# Altium PCB PCB_BaseBoard.PcbDoc
Units mil, origin at the board's own origin, x right, y up, seen from the top; angles counter-clockwise.
Board outline 2677.17 x 3346.46 mil, 2 copper layers (Top Layer, Bottom Layer); 63 components, 134 nets, 269 pads, 36 vias.
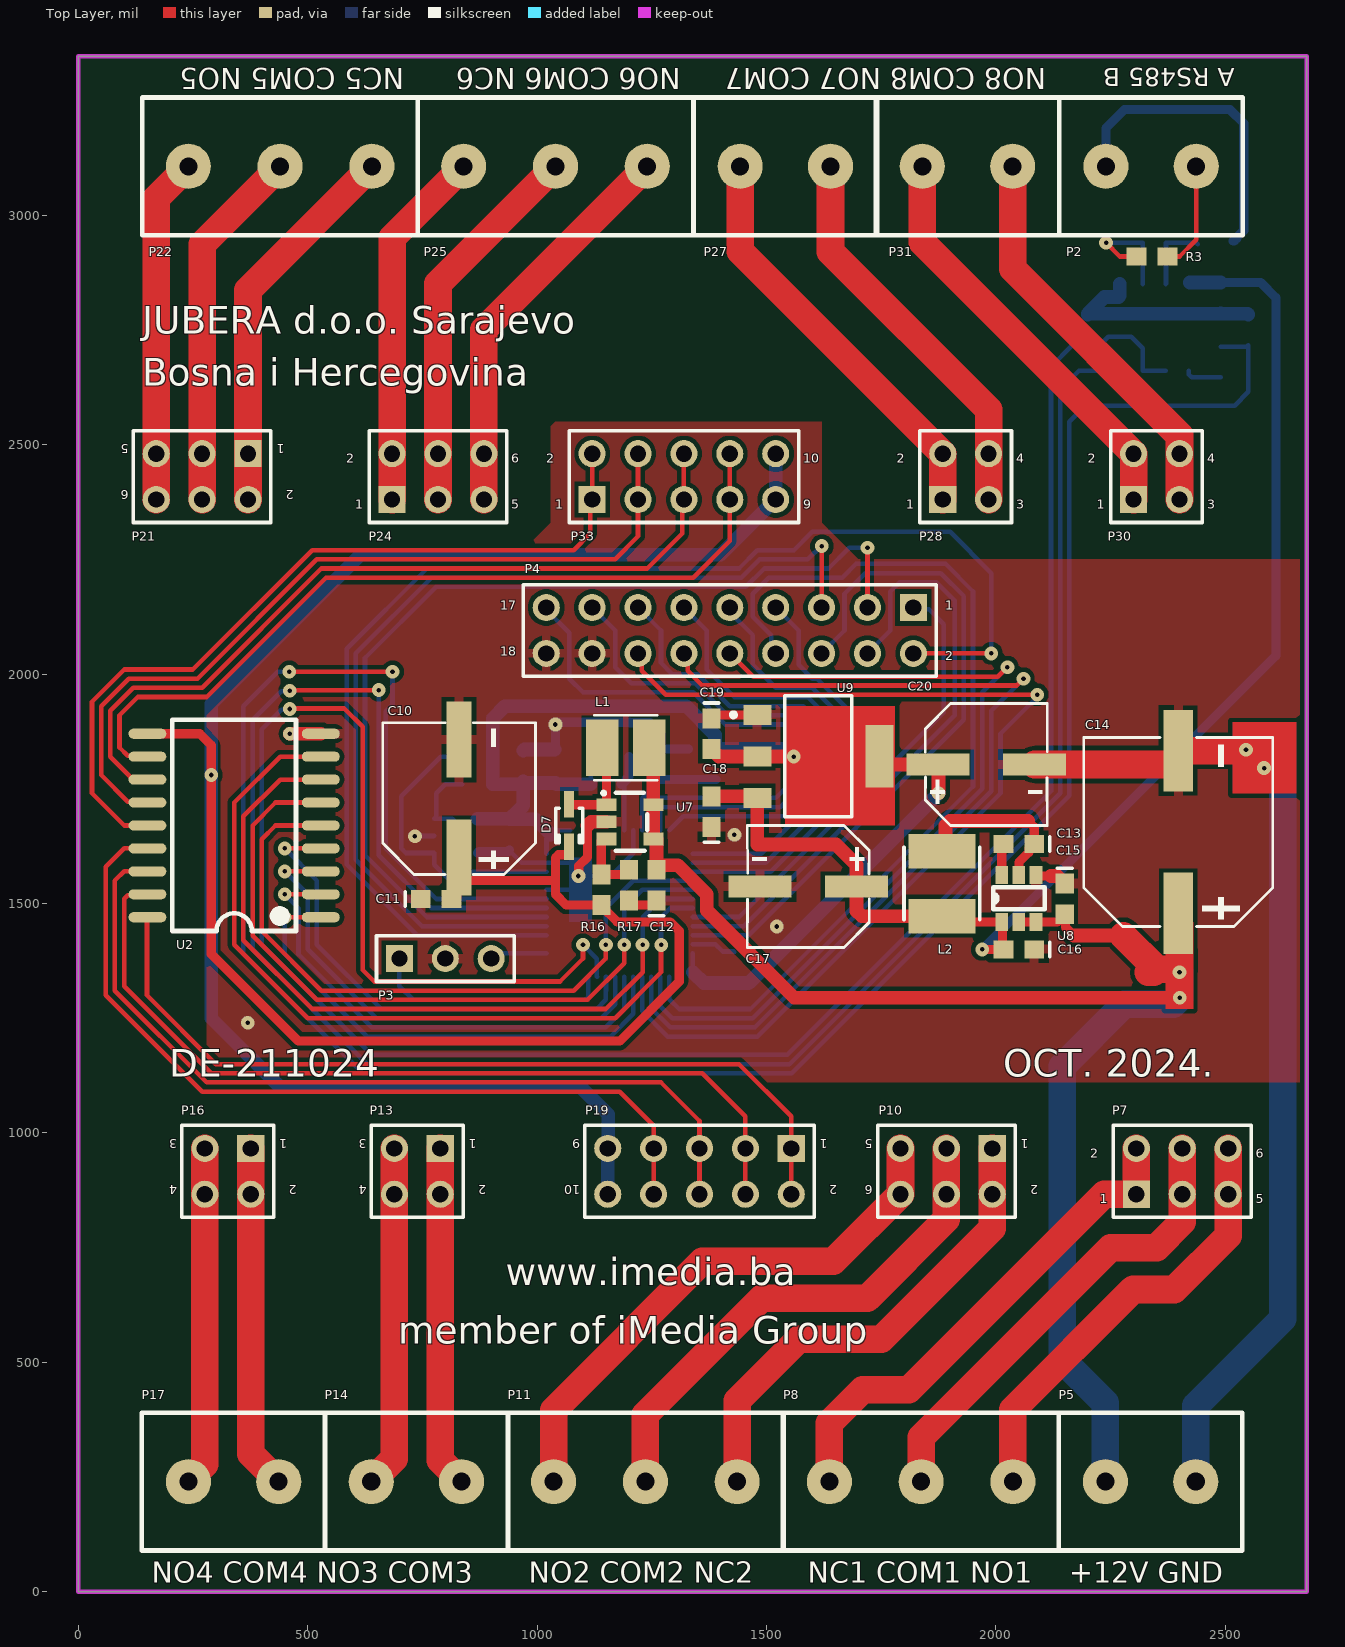
[diagram p0: Top Layer view]
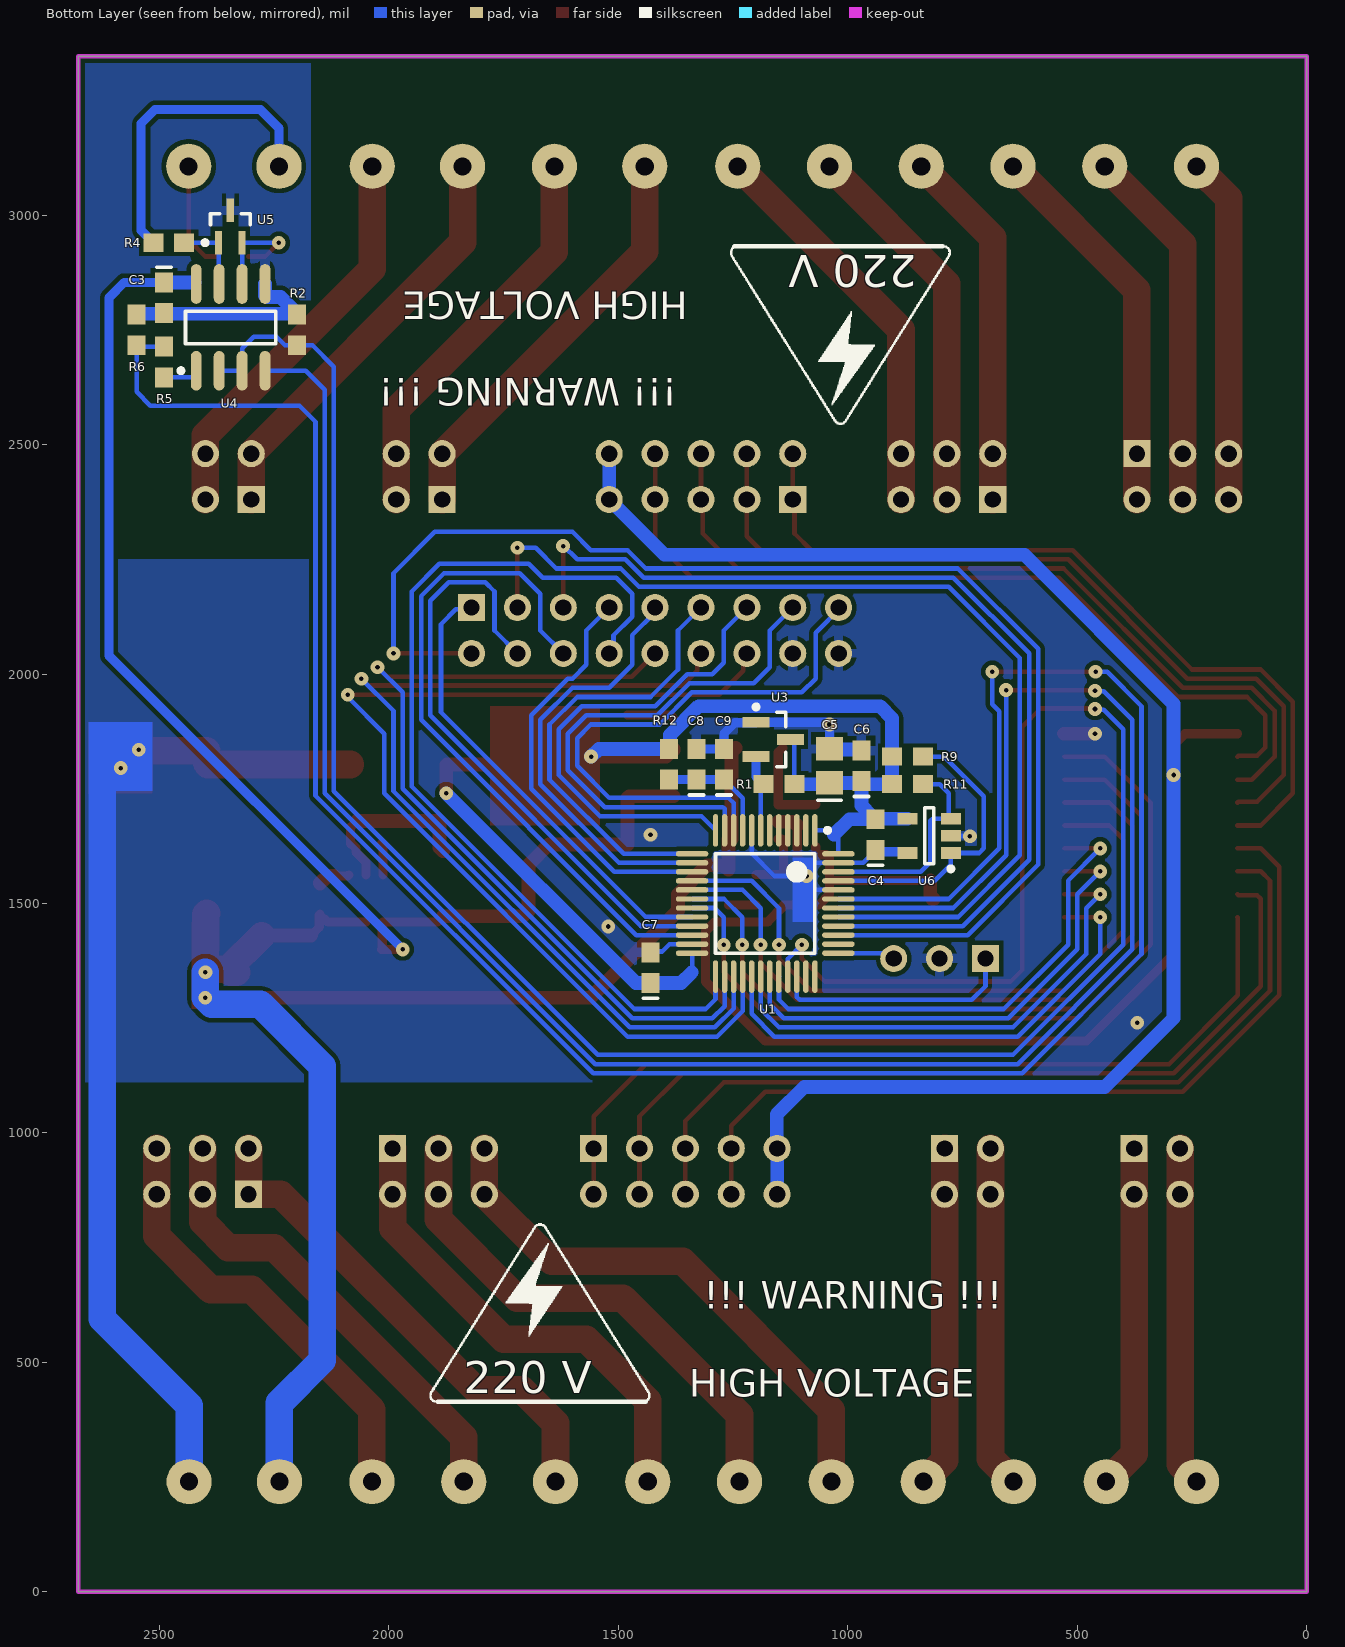
[diagram p1: Bottom Layer view, seen from below]

## Layer stack, top to bottom
Top Solder: solder mask 0.4, Solder Resist, Dk 3.5
Top Layer: signal copper 1.4
Dielectric 1: dielectric 12.6, FR-4, Dk 4.8
Bottom Layer: signal copper 1.4
Bottom Solder: solder mask 0.4, Solder Resist, Dk 3.5

## Board outline
0,0 0,3346.46 2677.17,3346.46 2677.17,0

## Design rules (kind name [scope] priority, off if disabled: settings)
BoardOutlineClearance [All] p1: gap=11.81 ignorepadtopadclearanceinfootprint=FALSE except(15.75: Arc-SplitBarrior Arc-SplitContinuation Track-SplitBarrior Track-SplitContinuation SMDPad-SplitBarrior SMDPad-SplitContinuation THPad-SplitBarrior THPad-SplitContinuation Via-SplitBarrior Via-SplitContinuation Fill-SplitBarrior Fill-SplitContinuation Poly-SplitBarrior Poly-SplitContinuation Region-SplitBarrior Region-SplitContinuation Text-SplitBarrior Text-SplitContinuation)
Clearance "Clearance Different Nets" [All] p1: gap=10 ignorepadtopadclearanceinfootprint=FALSE except(3.5: Arc-Arc Arc-Track Arc-SMDPad Track-Track Track-SMDPad; 5: SMDPad-SMDPad SMDPad-Via THPad-Via Via-Via; 7.87: Arc-THPad Arc-Hole Track-THPad Track-Hole SMDPad-THPad SMDPad-Hole THPad-Hole Fill-Hole Poly-Hole Region-Hole Text-Hole; 19.68: THPad-THPad Via-Hole)
Clearance "Clearance Same Nets" [All] p2: gap=10 ignorepadtopadclearanceinfootprint=FALSE except(3.5: Arc-Arc Arc-Track Arc-SMDPad Track-Track Track-SMDPad SMDPad-SMDPad; 5: SMDPad-Via THPad-Via; 7.87: Arc-THPad Arc-Hole Track-THPad Track-Hole SMDPad-THPad SMDPad-Hole THPad-THPad THPad-Hole Via-Hole Fill-Hole Poly-Hole Region-Hole Text-Hole)
Clearance "Clearance Bottom Layer" [OnLayer('Bottom Layer')] p3: gap=10 ignorepadtopadclearanceinfootprint=TRUE except(8: Arc-Arc Arc-Track Arc-SMDPad Arc-THPad Arc-Via Arc-Hole Track-Track Track-SMDPad Track-THPad Track-Via Track-Hole SMDPad-SMDPad SMDPad-THPad SMDPad-Via SMDPad-Hole THPad-THPad THPad-Via THPad-Hole Via-Via Via-Hole Fill-Hole Poly-Hole Region-Hole Text-Hole)
Clearance "Clearance Top Layer" [OnLayer('Top Layer')] p4: gap=10 ignorepadtopadclearanceinfootprint=TRUE except(8: Arc-Arc Arc-Track Arc-SMDPad Arc-THPad Arc-Via Arc-Hole Track-Track Track-SMDPad Track-THPad Track-Via Track-Hole SMDPad-SMDPad SMDPad-THPad SMDPad-Via SMDPad-Hole THPad-THPad THPad-Via THPad-Hole Via-Via Via-Hole Fill-Hole Poly-Hole Region-Hole Text-Hole)
HoleSize [All] p1: absolutevalues=TRUE maxlimit=248.03 minlimit=7.87 maxpercent=80.000 minpercent=20.000
MinimumAnnularRing [All] p1: minimumring=5.12
MinimumSolderMaskSliver [All] p1: minsoldermaskwidth=3.94
PolygonConnect PolygonConnect_1 [All] p1: thpad.connectstyle=Relief thpad.reliefconductorwidth=20 thpad.reliefentries=4 thpad.polygonreliefangle="90 Angle" thpad.airgapwidth=10 smdpad.connectstyle=Relief smdpad.reliefconductorwidth=20 smdpad.reliefentries=4 smdpad.polygonreliefangle="90 Angle" smdpad.airgapwidth=10 via.connectstyle=Direct via.reliefconductorwidth=20 via.reliefentries=4 via.polygonreliefangle="90 Angle" via.airgapwidth=10
RoutingCorners [All] p1: cornerstyle=Round minsetback=100 maxsetback=100
RoutingVias [All] p1: holewidth=19.68 width=39.37 viastyle="Through Hole" minholewidth=7.87 minwidth=13.78 maxholewidth=39.37 maxwidth=78.74
SilkToSilkClearance [All] p1: silktosilkclearance=3.94
SilkToSolderMaskClearance [IsPad] p1: minsilkscreentomaskgap=3.94 clearancetoexposedcopper=TRUE
SolderMaskExpansion [All] p1: expansion=4 istentingtop=FALSE
Width [All] p1: maxlimit=100 minlimit=3.5 preferedwidth=15
25 further rules are at their usual default settings.

## Classes and differential pairs
component class DE-211024_3: P21 P22 P24 P25 P27 P28 P30 P31 P33
component class DE-211024_2: P7 P8 P10 P11 P13 P14 P16 P17 P19
component class DE-211024_1: C3 C4 C5 C6 C7 C8 C9 C10 C11 C12 C13 C14 C15 C16 C17 C18 C19 C20 D7 L1 L2 P2 P3 P4 P5 R1 R2 R3 R4 R5 R6 R9 R11 R12 R16 R17 U1 U2 U3 U4 U5 U6 U7 U8 U9

## Components (designator, comment, footprint, x,y, rotation, side; value= is the part's Value field where it differs from the comment)
C3 "100nF" 0603 2490,2820 r270 bottom
C4 "" 0603 940,1650 r90 bottom value=100nF
C5 "4u7" 0805 1040,1800 r90 bottom
C6 "100nF" 0603 970,1800 r90 bottom
C7 "100nF" 0603 1430,1360 r90 bottom
C8 "1uF" 0603 1330,1803.46 r90 bottom
C9 "10nF" 0603 1270,1803.46 r90 bottom
C10 "220uF" SMD,D8xL10.2mm 836.39,1737.32 r90 top
C11 "" 0603 780,1510 r0 top value=100nF
C12 "C0603" 0603 1260,1540 r90 top value=3n3
C13 "" 0603 2050,1630 r180 top value=100nF
C14 "470uF" "ROQANG VT1V471M1010" 2403,1670 r90 top value=10uF
C15 "" 0603 2150,1510 r270 top value=100nF
C16 "" 0603 2050,1400 r180 top value=100nF
C17 "470uF" "SMD,D6.3xL7.7mm Aluminum Electrolytic Capacitors" 1580,1540 r180 top
C18 "" 0603 1380,1700 r90 top value=100nF
C19 "" 0603 1380,1870 r270 top value=100nF
C20 "" "SMD,D6.3xL7.7mm Aluminum Electrolytic Capacitors" 1990,1800 r0 top value=220uF
D7 "1N4148" SOD323 1070,1670 r270 top
L1 "10uH" "YJYCOIN CD32YP0302-100M" 1190,1840 r180 top
L2 "" XRNR4030-4.7uH/M 1880,1540 r90 top value=4,7uH
P2 "" "TERMINAL BLOK 2" 2338,3106.5 r270 top locked
P3 "ULINK ICSP" HDR1X3 700,1380 r0 top
P4 "Header 9X2" HDR2X9 1820,2145 r180 top
P5 "" "TERMINAL BLOK 2" 2337,240 r90 top locked
P7 "Header 3X2" HDR2X3 2306,866.3 r0 top locked
P8 "RELAY 1" "TERMINAL BLOK 3" 1837,240 r90 top locked
P10 "Header 3X2" HDR2X3 1992,966.3 r180 top locked
P11 "RELAY 2" "TERMINAL BLOK 3" 1236,240 r270 top locked
P13 "Header 2X2" HDR2X2 789,966.3 r180 top locked
P14 "RELAY 3" "TERMINAL BLOK 2" 737,240 r90 top locked
P16 "Header 2X2" HDR2X2 376,966.3 r180 top locked
P17 "RELAY 4" "TERMINAL BLOK 2" 338.5,240 r90 top locked
P19 "Header 5X2" HDR2X5 1554,966.3 r180 top locked
P21 "Header 3X2" HDR2X3 370,2480.3 r180 top locked
P22 "RELAY 5" "TERMINAL BLOK 3" 440,3106.5 r270 top locked
P24 "Header 3X2" HDR2X3 684.07,2380.3 r0 top locked
P25 "RELAY 6" "TERMINAL BLOK 3" 1040,3106.5 r90 top locked
P27 "RELAY 7" "TERMINAL BLOK 2" 1541,3106.5 r270 top locked
P28 "Header 2X2" HDR2X2 1884,2380.3 r0 top locked
P30 "Header 2X2" HDR2X2 2300,2380.3 r0 top locked
P31 "RELAY 8" "TERMINAL BLOK 2" 1938,3106.5 r270 top locked
P33 "Header 5X2" HDR2X5 1120,2380.3 r0 top locked
R1 "10K" ERA-0603 1150,1760 r180 bottom
R2 "10K" ERA-0603 2200,2750 r270 bottom
R3 "10R" ERA-0603 2340,2910 r180 top
R4 "10R" ERA-0603 2480,2940 r180 bottom
R5 "1K2" ERA-0603 2490,2680 r270 bottom
R6 "2K2" ERA-0603 2550,2750 r90 bottom
R9 "2K2" ERA-0603 870,1820 r0 bottom
R11 "2K2" ERA-0603 870,1760 r0 bottom
R12 "10R" ERA-0603 1390,1803.46 r90 bottom
R16 "2K2" ERA-0603 1140,1530 r270 top value=33K
R17 "2K2" ERA-0603 1200,1540 r90 top value=1K8
U1 "STM32F030C8T6" STM-LQFP48_N 1180,1500 r270 bottom
U2 "ULN2803A" SOIC-18_L11.6-W7.5-P1.27-LS10.3-BL 340,1670 r90 top
U3 "TLV803MDBZR" DBZ3_N 1162.6,1857.4 r180 bottom
U4 "SN75176BD" D008_N 2345,2755.51 r90 bottom
U5 "ESDS552" DCK3_N 2345.59,2975.43 r90 bottom
U6 "24AA01T-I/OT" SOT-23-OT5_N 822.76,1647.4 r0 bottom
U7 "AP3012KTR-E1" SOT-23-5 1200,1680 r180 top
U8 "" TSOT-26 2012.6,1460 r90 top
U9 "" ZZ311 1612.87,1820.55 r270 top

## Footprints (in the part's own frame and the unit in brackets; to place one, negate y for a bottom-side part, rotate by r counter-clockwise, add the part's x,y. Pads: shape width x height; smd on the part's side, far side on the other; paste and mask are expansions set on the pad)
0603 [mm] "Chip Capacitor; Body 1.6 x 0.8 mm (LxW typ)"
  rect 1.1x1 smd: 1(-0.85,0) 2(0.85,0)
  silkscreen extent -1.7,-0.4 -1.7,0.4
0805 [mm] "Chip Capacitor; Body 2.0 x 1.2 mm (LxW typ)"
  rect 1.3x1.5 smd: 1(-0.95,0) 2(0.95,0)
  silkscreen extent -1.9,-0.65 -1.9,0.65
D008_N [mm] "SOIC, 8-Leads, Body 4.9x3.9mm, Pitch 1.27mm, IPC Medium Density"
  oval 2.2x0.6 smd: 1(-2.4,1.905) 2(-2.4,0.635) 3(-2.4,-0.635) 4(-2.4,-1.905) 5(2.4,-1.905) 6(2.4,-0.635) 7(2.4,0.635) 8(2.4,1.905)
  silkscreen extent -2.52,-2.5 0.9,2.88, body extent -1.95,-2.45 1.95,2.45, height 1.75
DBZ3_N [mm] "SOT23, 3-Leads, Body 2.9x1.3mm, Pitch 0.95mm, Lead Span 2.4mm, IPC Medium Density"
  rect 1.5x0.6 smd: 1(-0.95,0.95) 2(-0.95,-0.95) 3(0.95,0)
  silkscreen extent -1.07,-1.5 0.7,1.92, body extent -0.7,-1.52 0.7,1.52, height 1.12
DCK3_N [mm] "SOT23, 3-Leads, Body 2.0x1.25mm, Pitch 0.65mm, Lead Span 2.1mm, IPC Medium Density"
  rect 1.3x0.4 smd: 1(-0.9,0.65) 2(-0.9,-0.65) 3(0.9,0)
  silkscreen extent -1.02,-1.1 0.7,1.53, body extent -0.7,-1.07 0.7,1.08, height 1.1
ERA-0603 [mm] "Chip Resistor; Body 1.6 x 0.8 mm (LxW typ)"
  rect 1.1x1 smd: 1(-0.85,0) 2(0.85,0)
HDR1X3 [mm] "Connector; Header; 3 Position"
  rect 1.5x1.5 hole 0.9: 1(0,0)
  round 1.5 hole 0.9: 2(2.54,0) 3(5.08,0)
  silkscreen extent -1.27,-1.27 6.35,1.27
HDR2X2 [mm] "Connector; Header; 2x2 Position"
  rect 1.5x1.5 hole 0.9: 1(0,0)
  round 1.5 hole 0.9: 2(0,2.54) 3(2.54,0) 4(2.54,2.54)
  silkscreen extent -1.27,-1.27 3.81,3.81
HDR2X3 [mm] "Connector; Header; 3x2 Position"
  rect 1.5x1.5 hole 0.9: 1(0,0)
  round 1.5 hole 0.9: 2(0,2.54) 3(2.54,0) 4(2.54,2.54) 5(5.08,0) 6(5.08,2.54)
  silkscreen extent -1.27,-1.27 6.35,3.81
HDR2X5 [mm] "Connector; Header; 5x2 Position"
  rect 1.5x1.5 hole 0.9: 1(0,0)
  round 1.5 hole 0.9: 2(0,2.54) 3(2.54,0) 4(2.54,2.54) 5(5.08,0) 6(5.08,2.54) 7(7.62,0) 8(7.62,2.54) 9(10.16,0) 10(10.16,2.54)
  silkscreen extent -1.27,-1.27 11.43,3.81
HDR2X9 [mm] "Connector; Header; 9x2 Position"
  rect 1.5x1.5 hole 0.9: 1(0,0)
  round 1.5 hole 0.9: 2(0,2.54) 3(2.54,0) 4(2.54,2.54) 5(5.08,0) 6(5.08,2.54) 7(7.62,0) 8(7.62,2.54) 9(10.16,0) 10(10.16,2.54) 11(12.7,0) 12(12.7,2.54) 13(15.24,0) 14(15.24,2.54) 15(17.78,0) 16(17.78,2.54) 17(20.32,0) 18(20.32,2.54)
  silkscreen extent -1.27,-1.27 21.59,3.81
"ROQANG VT1V471M1010" [mm] "470uF 35V 286mA@120Hz ±20% SMD,D10xL10.2mm Aluminum Electrolytic Capacitors - SMD ROHS"
  rect 4.5x1.65 smd: 1(-4.862,0.146) 2(4.138,0.146)
  silkscreen extent -5.59,-5.08 4.86,5.37, body extent -5,-5 5,5, height 10.2
"SMD,D6.3xL7.7mm Aluminum Electrolytic Capacitors" [mm]
  rect 3.5x1.2 smd paste+0 mask+0.051: 1(-2.949,0.074) 2(2.391,0.074)
  silkscreen extent -3.66,-3.3 3.1,3.45, body extent -3.4,-3.15 2.9,3.15, height 7.7
SMD,D8xL10.2mm [mm] "220uF 35V 195mA@120Hz ±20% SMD,D8xL10.2mm Aluminum Electrolytic Capacitors - SMD ROH"
  rect 4.2x1.4 smd paste+0 mask+0.051: 1(-3.488,0.162) 2(3.046,0.162)
  silkscreen extent -4.42,-4.06 3.98,4.39, body extent -4.25,-3.82 3.75,4.18, height 10.2
SOD323 [mm] "SOD-323/SC-76; 2 Leads; Body 1.7 x 1.3 mm, (LxW)"
  rect 1.45x0.55 smd: 1(1.175,0) 2(-1.175,0)
  silkscreen extent -0.95,-0.75 0.95,0.75
SOIC-18_L11.6-W7.5-P1.27-LS10.3-BL [mm] ";SOIC-18-300mil;SOIC-18;SOP-18-300mil;SOIC-18_300mil;SO-18;SW-18;SOP-18;SOIC-18-W;-;SO-18-300mil"
  oval 0.56x2.1 smd: 1(-5.08,-4.792) 2(-3.81,-4.792) 3(-2.54,-4.792) 4(-1.27,-4.792) 5(0,-4.792) 6(1.27,-4.792) 7(2.54,-4.792) 8(3.81,-4.792) 9(5.08,-4.792) 10(5.08,4.808) 11(3.81,4.808) 12(2.54,4.808) 13(1.27,4.808) 14(0,4.808) 15(-1.27,4.808) 16(-2.54,4.808) 17(-3.81,4.808) 18(-5.08,4.808)
  silkscreen extent -5.84,-3.42 5.84,3.44
SOT-23-5 [mm] "SMD package"
  rect 1.1x0.7 smd paste+0 mask+0.051: 1(1.233,-0.897) 2(1.233,0.053) 3(1.233,1.005) 4(-1.355,1.005) 5(-1.355,-0.895)
  silkscreen extent -1.03,-1.6 1.46,1.66
SOT-23-OT5_N [mm] "SOT23, 5-Leads, Body 2.9x1.6mm, Pitch 0.95mm, Lead Span 2.7mm, IPC Medium Density"
  rect 1.1x0.65 smd: 1(-1.2,0.95) 2(-1.2,0) 3(-1.2,-0.95) 4(1.2,-0.95) 5(1.2,0.95)
  silkscreen extent -1.32,-1.55 0.25,1.95, body extent -0.9,-1.55 0.9,1.55, height 1.45
STM-LQFP48_N [mm] "QFP, 48-Leads, Body 7x7mm, Pitch 0.5mm, IPC Medium Density"
  oval 1.8x0.3 smd: 1(-4.05,2.75) 2(-4.05,2.25) 3(-4.05,1.75) 4(-4.05,1.25) 5(-4.05,0.75) 6(-4.05,0.25) 7(-4.05,-0.25) 8(-4.05,-0.75) 9(-4.05,-1.25) 10(-4.05,-1.75) 11(-4.05,-2.25) 12(-4.05,-2.75) 25(4.05,-2.75) 26(4.05,-2.25) 27(4.05,-1.75) 28(4.05,-1.25) 29(4.05,-0.75) 30(4.05,-0.25) 31(4.05,0.25) 32(4.05,0.75) 33(4.05,1.25) 34(4.05,1.75) 35(4.05,2.25) 36(4.05,2.75)
  oval 0.3x1.8 smd: 13(-2.75,-4.05) 14(-2.25,-4.05) 15(-1.75,-4.05) 16(-1.25,-4.05) 17(-0.75,-4.05) 18(-0.25,-4.05) 19(0.25,-4.05) 20(0.75,-4.05) 21(1.25,-4.05) 22(1.75,-4.05) 23(2.25,-4.05) 24(2.75,-4.05) 37(2.75,4.05) 38(2.25,4.05) 39(1.75,4.05) 40(1.25,4.05) 41(0.75,4.05) 42(0.25,4.05) 43(-0.25,4.05) 44(-0.75,4.05) 45(-1.25,4.05) 46(-1.75,4.05) 47(-2.25,4.05) 48(-2.75,4.05)
  silkscreen extent -4.17,-2.75 2.75,3.57, body extent -3.5,-3.5 3.5,3.5, height 1.6
"TERMINAL BLOK 2" [mm] "Terminal blok 3,5mm"
  round 2.5 hole 1: 1(0,-2.5) 2(0,2.5)
  silkscreen extent -3.81,-5.08 3.81,5.08
"TERMINAL BLOK 3" [mm] "Terminal blok konektor 3 pina"
  round 2.5 hole 1: 1(0,5.08) 2(0,0) 3(0,-5.08)
  silkscreen extent -3.81,-7.62 3.81,7.62
TSOT-26 [mm]
  rect 1x0.7 smd: 1(0,0) 2(0,-0.95) 3(0,-1.9) 4(2.6,-1.9) 5(2.6,-0.95) 6(2.6,0)
  silkscreen extent 0.69,-2.38 1.91,0.48, body extent 0.53,-2.51 2.03,0.61, height 1
XRNR4030-4.7uH/M [mm] "2A 4.7uH Magnetic Adhesive Inductor ±20% 2.9A SMD-2P,4x4mm Power Inductors ROHS"
  rect 1.9x3.7 smd paste+0 mask+0.051: 1(-1.717,-0.059) 2(1.883,-0.059)
  silkscreen extent -1.92,-2.16 2.08,2.04
"YJYCOIN CD32YP0302-100M" [mm] "1A 10uH ±20% SMD,3.5x3x2.1mm Power Inductors ROHS"
  rect 1.8x3.12 smd paste+0 mask+0.051: 1(1.22,0.022) 2(-1.386,0.022)
  silkscreen extent -1.83,-1.78 1.67,1.82
ZZ311 [mm] "SOT-223/SC-73; 4 Leads; Body 6.7 x 7.3 mm, inc. leads (LxW max)"
  rect 1.1x1.55 smd: 1(-2.3,-3.375) 2(0,-3.375) 3(2.3,-3.375)
  rect 3.45x1.55 smd: 4(0,3.375)
  silkscreen extent -3.35,-4.82 3.35,1.85

## Part data
C3 C4 C6 C7 C8 C9 C11 C15 C19: library part C0603, "Ceramic Chip Capacitor - Standard", PackageDocument=Mar-2001, Code_IPC="1608 [0603]", Code_JEITA=0603, ComponentLink1Description="Manufacturer Link", ComponentLink1URL=http://www.kemet.com/, ComponentLink2Description=Datasheet, ComponentLink2URL=http://www.kemet.com/kemet/web/homepage/kechome.nsf/vapubfilesname/F3102TA.pdf/$file/F3102TA.pdf, DatasheetDocument=Mar-2001, LatestRevisionDate=19-Mar-2004, LatestRevisionNote="Silkscreen size reduced.", Note="Footprint corresponds to dimensions for bulk cassette packaging. This case size has tightened tolerances.", PackageReference=0603, Published=17-Jul-2002, Publisher="Altium Limited"
C5: library part C0805, "Ceramic Chip Capacitor - Standard", PackageDocument=Mar-2001, Code_IPC=2012[0805], Code_JEITA=0805, ComponentLink1Description="Manufacturer Link", ComponentLink1URL=http://www.kemet.com/, ComponentLink2Description=Datasheet, ComponentLink2URL=http://www.kemet.com/kemet/web/homepage/kechome.nsf/vapubfilesname/F3102TA.pdf/$file/F3102TA.pdf, DatasheetDocument=Mar-2001, LatestRevisionDate=19-Mar-2004, LatestRevisionNote="Silkscreen size reduced.", Note="Footprint corresponds to dimensions for bulk cassette packaging. This case size has tightened tolerances.", PackageReference=0805, Published=17-Jul-2002, Publisher="Altium Limited"
C10: library part "ROQANG VT1V221M0810", "220uF 35V 195mA@120Hz ±20% SMD,D8xL10.2mm Aluminum Electrolytic Capacitors - SMD ROHS", ComponentLink1Description="Manufacturer Link", ComponentLink1URL=http://www.vishay.com/, ComponentLink2Description=Datasheet, ComponentLink2URL=http://www.vishay.com/docs/25014/eka.pdf, DatasheetDocument=20-Feb-2001, DrillSize="Nominal, Rounded To The Nearest 0.1mm", Note="Refer to Manufacturer's Data Sheets for other lead formations", PackageReference=CAPPR2-5X11, Published=19-Mar-2004, Publisher="Altium Limited"
C12: "Ceramic Chip Capacitor - Standard", PackageDocument=Mar-2001, Code_IPC="1608 [0603]", Code_JEITA=0603, ComponentLink1Description="Manufacturer Link", ComponentLink1URL=http://www.kemet.com/, ComponentLink2Description=Datasheet, ComponentLink2URL=http://www.kemet.com/kemet/web/homepage/kechome.nsf/vapubfilesname/F3102TA.pdf/$file/F3102TA.pdf, DatasheetDocument=Mar-2001, LatestRevisionDate=19-Mar-2004, LatestRevisionNote="Silkscreen size reduced.", Note="Footprint corresponds to dimensions for bulk cassette packaging. This case size has tightened tolerances.", PackageReference=0603, Published=17-Jul-2002, Publisher="Altium Limited"
C13 C16 C18: library part C0603, "Ceramic Chip Capacitor - 25V", PackageDocument=Mar-2001, Code_IPC="1608 [0603]", Code_JEITA=0603, ComponentLink1Description="Manufacturer Link", ComponentLink1URL=http://www.kemet.com/, ComponentLink2Description=Datasheet, ComponentLink2URL=http://www.kemet.com/kemet/web/homepage/kechome.nsf/vapubfilesname/F3102TA.pdf/$file/F3102TA.pdf, DatasheetDocument=Mar-2001, LatestRevisionDate=19-Mar-2004, LatestRevisionNote="Silkscreen size reduced.", Note="Footprint corresponds to dimensions for bulk cassette packaging. This case size has tightened tolerances.", PackageReference=0603, Published=17-Jul-2002, Publisher="Altium Limited"
C14 C17 C20: library part "ROQANG VT1C221M0607", "220uF 16V 110mA@120Hz ±20% SMD,D6.3xL7.7mm Aluminum Electrolytic Capacitors - SMD ROHS", ComponentLink1Description="Manufacturer Link", ComponentLink1URL=http://www.vishay.com/, ComponentLink2Description=Datasheet, ComponentLink2URL=http://www.vishay.com/docs/25014/eka.pdf, DatasheetDocument=20-Feb-2001, DrillSize="Nominal, Rounded To The Nearest 0.1mm", Note="Refer to Manufacturer's Data Sheets for other lead formations", PackageReference=CAPPR2-5X11, Published=19-Mar-2004, Publisher="Altium Limited"
D7: library part BAS321, "General-purpose Diode", ComponentLink1Description="Manufacturer Link", ComponentLink1URL=http://www.semiconductors.philips.com/, ComponentLink2Description=Datasheet, ComponentLink2URL=http://www.semiconductors.philips.com/acrobat/datasheets/BAS321_2.pdf, DatasheetVersion=9-Feb-1999, LatestRevisionDate=19-Mar-2004, LatestRevisionNote="Silkscreen size reduced.", PackageDescription="SOD-323/SC-76; 2 Leads; Body 1.7 x 1.3 mm, (LxW)", PackageReference=SOD323, PackageVersion=May-1999, Published=17-Sep-2003, Publisher="Altium Limited"
L1: library part Inductor
L2: library part Inductor, "2A 4.7uH Magnetic Adhesive Inductor ±20% 2.9A SMD-2P,4x4mm Power Inductors ROHS"
P2 P5 P14 P17 P27 P31: library part "TERMINAL BLOK 2", "Terminal blok konektor 3,5 mm"
P3: library part "Header 3", "Header, 3-Pin", LatestRevisionDate=17-Jul-2002, LatestRevisionNote="Re-released for DXP Platform.", Publisher="Altium Limited"
P4: "Header, 9-Pin, Dual row", LatestRevisionDate=17-Jul-2002, LatestRevisionNote="Re-released for DXP Platform.", Publisher="Altium Limited"
P7 P10 P21 P24: "Header, 3-Pin, Dual row", LatestRevisionDate=17-Jul-2002, LatestRevisionNote="Re-released for DXP Platform.", Publisher="Altium Limited"
P8 P11 P22 P25: library part "TERMINAL BLOK 3", "3 pinski terminal blok konektor"
P13 P16 P28 P30: "Header, 2-Pin, Dual row", LatestRevisionDate=17-Jul-2002, LatestRevisionNote="Re-released for DXP Platform.", Publisher="Altium Limited"
P19 P33: "Header, 5-Pin, Dual row", LatestRevisionDate=17-Jul-2002, LatestRevisionNote="Re-released for DXP Platform.", Publisher="Altium Limited"
R1 R9 R11 R16 R17: library part ERA3Y, "Rectangular Thick Film Chip Resistor, 10 Ohm to 330k Ohm Range, 0.1% and 0.5% Tolerance, 0603 Size, 0.063 W", PackageDocument=Mar-2003, Code_IPC="1608 [0603]", ComponentLink1Description="Manufacturer Link", ComponentLink1URL=http://www.panasonic.com/industrial/components/resistive_products.htm, ComponentLink2Description=Datasheet, ComponentLink2URL=http://www.panasonic.com/industrial/components/pdf/AOA0000CE8.pdf, LatestRevisionDate=19-Mar-2004, LatestRevisionNote="Silkscreen size reduced.", Note="If flow soldering, adjust pad width of PCB Footprint to 0.7 - 0.8 times the width of the resistor.", PackageReference=ERA-0603, Published=17-Dec-2003, Publisher="Altium Limited"
R2 R3 R4 R5 R6: library part ERAV, "Metal Film Thermosensitive Chip Resistor, 0.56 Ohm to 10k Ohm Range, 5% Tolerance, 0603 Size, 0.063 W", PackageDocument=Mar-2003, Code_IPC="1608 [0603]", ComponentLink1Description="Manufacturer Link", ComponentLink1URL=http://www.panasonic.com/industrial/components/resistive_products.htm, ComponentLink2Description=Datasheet, ComponentLink2URL=http://www.panasonic.com/industrial/components/pdf/AOF0000CE1.pdf, LatestRevisionDate=19-Mar-2004, LatestRevisionNote="Silkscreen size reduced.", Note="If flow soldering, adjust pad width of PCB Footprint to 0.7 - 0.8 times the width of the resistor.", PackageReference=ERA-0603, Published=17-Dec-2003, Publisher="Altium Limited"
R12: library part ERA6Y, "Rectangular Thick Film Chip Resistor, 10 Ohm to 1M Ohm Range, 0.1% and 0.5% Tolerance, 0805 Size, 0.1 W", PackageDocument=Mar-2003, Code_IPC="2012 [0805]", ComponentLink1Description="Manufacturer Link", ComponentLink1URL=http://www.panasonic.com/industrial/components/resistive_products.htm, ComponentLink2Description=Datasheet, ComponentLink2URL=http://www.panasonic.com/industrial/components/pdf/AOA0000CE8.pdf, LatestRevisionDate=19-Mar-2004, LatestRevisionNote="Silkscreen size reduced.", Note="If flow soldering, adjust pad width of PCB Footprint to 0.7 - 0.8 times the width of the resistor.", PackageReference=ERA-0805, Published=17-Dec-2003, Publisher="Altium Limited"
U1: "ARM Cortex-M0 32-bit MCU, 64 KB Flash, 8 KB Internal RAM, 39 I/Os, 48-pin LQFP, -40 to 85 degC, Tray", I/Os (High Current)=39, Operating Frequency(F) (Processor speed) (MHz)=48, Supplier Part Number 1=497-14043-ND, Supply Voltage(Vcc) min (V)=2.4, ComponentLink1Description="Manufacturer URL", ComponentLink1URL=http://www.st.com/web/en/home.html, ComponentLink2Description=Datasheet, ComponentLink2URL=http://www.st.com/st-web-ui/static/active/en/resource/technical/document/datasheet/DM00088500.pdf, ComponentLink3Description="Package Specification", ComponentLink3URL=http://www.st.com/st-web-ui/static/active/en/resource/technical/document/datasheet/DM00058181.pdf, Core="ARM Cortex-M0", DatasheetVersion="Rev. 1", FLASH Size (Prog) (kB)=64, Internal RAM Size (kB)=8, Mounting Technology="Surface Mount", PackageDescription="48-Pin Low Profile Quad Flat Package, 7 x 7 mm Body, 0.5 mm Pitch", PackageReference=LQFP48, PackageVersion="Rev. 6, 06/2013", Packing=Tray, PartNumber=STM32F030C8T6, Supplier 1=Digi-Key, Supplier 2=Newark, Supplier 3=Mouser, Supplier Part Number 2=06X3647, Supplier Part Number 3=511-STM32F030C8T6
U2: "High-Voltage, High-Current Darlington Array", ComponentLink1Description="Manufacturer Link", ComponentLink1URL=http://www.allegromicro.com/, DatasheetVersion=1999, LatestRevisionDate=06-Jun-2005, LatestRevisionNote="Stylized 3D Model Added.", PackageDescription="DIP; 18 Leads; Row Spacing 7.62 mm; Pitch 2.54 mm", PackageReference=A18, PackageVersion=1999, Published=13-Oct-2000, Publisher="Altium Limited"
U3: "Voltage Supervisor with Active-Low, Open Drain Reset, 1 Supply Monitored, -40 to 125 degC, 3-pin SOT-23 (DBZ), Green (RoHS & no Sb/Br)", Manufacturer="Texas Instruments", Rating=Catalog, Supplier Part Number 1=296-29194-2-ND, Threshold Voltage 1 (typ)(Typ)(V)=4.38, # of supplies monitored=1, Code_JEDEC=TO-236-AB, ComponentLink1Description=Datasheet, ComponentLink1URL=http://www.ti.com/general/docs/lit/getliterature.tsp?genericPartNumber=TLV803M&fileType=pdf, DatasheetVersion=SBVS157B, Iq(Typ)(uA)=9, Mounting Technology="Surface Mount", Output Driver Type / Reset Output="Active-low, Open-drain", PackageDescription="3-Pin Plastic Small-Outline Package, 0.95 mm Pitch, 2.4 mm Lead Span", PackageReference=DBZ3, PackageVersion="revB, Apr-2005", PartNumber=TLV803MDBZR, Reset Threshold Accuracy(%)=2, SubFamily="Supervisor and Reset IC", Supplier 1=Digi-Key, Supplier 2=Digi-Key, Supplier 3=Digi-Key, Supplier 4=Newark, Supplier 5=Mouser, Supplier Part Number 2=296-29194-1-ND, Supplier Part Number 3=296-29194-6-ND, Supplier Part Number 4=58T0286, Supplier Part Number 5=595-TLV803MDBZR, Time Delay(ms)=200, VCC(Max)(V)=6, VCC(Min)(V)=1.1
U4: "Differential Bus Transceiver", Code_IPC=SOIC127P600-8, ComponentLink1Description="Manufacturer Link", ComponentLink1URL=http://www.ti.com/, ComponentLink2Description=Datasheet, ComponentLink2URL=http://www-s.ti.com/sc/ds/sn75176b.pdf, DatasheetVersion=Sep-1989, LatestRevisionDate=13-Apr-2006, LatestRevisionNote="IPC-7351 Footprint Added.", Note="Receiver Hysteresis of 50mV Typical", PackageDescription="8-Pin Small Outline Integrated Circuit 1.27 mm Pitch", PackageReference=D008, PackageVersion=Jan-1998, Published=15-May-2002, Publisher="Altium Limited"
U5: library part TPD2E007DCKR, "ESD Protection Array for AC Signal Data Interface, 2 Channels, -40 to +85 degC, 3-pin SC70 (DCK), Green (RoHS & no Sb/Br)", Breakdown Voltage(Min)(V)=+/-14, IO Capacitance(Typ)(pF)=15, IO Leakage Current(nA)=50, Manufacturer="Texas Instruments", Supplier Part Number 1=296-25281-2-ND, ComponentLink1Description=Datasheet, ComponentLink1URL=http://www.ti.com/general/docs/lit/getliterature.tsp?genericPartNumber=TPD2E007&fileType=pdf, ComponentLink2Description="URL Link1", ComponentLink2URL=SamplesURL:http://www.ti.com/product/tpd2e007#samples, DatasheetVersion=SLVS796E, Eco-Plan="Green (RoHS & no Sb/Br)", IEC 61000-4-2 Air-Gap(+/- kV)=15, IEC 61000-4-2 Contact(+/- kV)=8, Mounting Technology="Surface Mount", PackageDescription="3-Pin Plastic Small-Outline Package, 0.65 mm Pitch, 2.1 mm Lead Span", PackageReference=DCK3, PackageVersion="revG, Jan-2007", PartNumber=TPD2E007DCKR, SubFamily="ESD Solution", Supplier 1=Digi-Key, Supplier 2=Digi-Key, Supplier 3=Digi-Key, Supplier 4=Farnell, Supplier 5=Newark, Supplier 6=Newark, Supplier 7=Mouser, Supplier Part Number 2=296-25281-1-ND, Supplier Part Number 3=296-25281-6-ND, Supplier Part Number 4=2120465, Supplier Part Number 5=94T5089, Supplier Part Number 6=55R7554, Supplier Part Number 7=595-TPD2E007DCKR
U6: "1Kbit, 400kHz, 1.8V, I2C Serial EEPROM, 5-Pin SOT-23, Industrial Temperature, Tape and Reel", Supplier Part Number 1=24AA01T-I/OTTR-ND, Code_IPC=SOT23-5, ComponentLink1Description=Datasheet, ComponentLink1URL=http://ww1.microchip.com/downloads/en/DeviceDoc/21711J.pdf, ComponentLink2Description="Packaging Specification", ComponentLink2URL=http://www.microchip.com/stellent/groups/techpub_sg/documents/packagingspec/en012702.pdf, ComponentLink3Description="Microchip.com Home", ComponentLink3URL=http://www.microchip.com/, DatasheetVersion="revJ, Jan-2009", PackageDescription="5-Lead Plastic Small Outline Transistor (OT) [SOT-23]", PackageReference=SOT-23-OT5, PackageVersion="revBB, Aug-2009", Published=29-Jan-2009, Publisher="Altium Limited", Supplier 1=Digi-Key, Supplier 2=Digi-Key, Supplier 3=Digi-Key, Supplier 4=Farnell, Supplier Part Number 2=24AA01T-I/OTCT-ND, Supplier Part Number 3=24AA01T-I/OTDKR-ND, Supplier Part Number 4=1331269
U7: library part AP3012, "Diodes Incorporated AP3012KTR-E1 Boost type Adjustable 1.25V~29V 500mA 2.6V~16V SOT-23-5 DC-DC Converters ROHS"
U8: library part AP63200, "2A synchronous  buck converter"
U9: library part REG1117-3.3, "800mA and 1A Low Dropout Positive Regulator 2.85V, 3.3V, 5V, and Adjustable", ComponentLink1Description="Manufacturer Link", ComponentLink1URL=http://www.ti.com/, ComponentLink2Description=Datasheet, ComponentLink2URL=http://www-s.ti.com/sc/ds/REG1117.pdf, DatasheetVersion=Sep-1997, LatestRevisionDate=17-Jul-2002, LatestRevisionNote="Re-released for DXP Platform.", PackageDescription="SOT-223/SC-73; 4 Leads; Body 6.7 x 7.3 mm, inc. leads (LxW max)", PackageReference=ZZ311, PackageVersion=revC, Published=8-Jun-2000, Publisher="Altium Limited"

## Via types
v1: diameter 30, hole 10, Top Layer to Bottom Layer, 36 vias

## Nets (pads, with @x,y where several pads share a name; then routed paths per layer and width w, separated by ;. In a path a pad name is that pad's centre, name@x,y a point inside that pad or via, vN(x,y) a via of type N, cw(c..) or ccw(c..) an arc to the next point about the centre after c; other vN are vias at no path point)
3V3: C4.2 C5.1 C6.1 C7.1 C19.2 C20.1 R1.2 R9.2 R11.2 R12.2 U1.1 U1.24 U1.48 U3.3 U6.4 U9.2 U9.4 | length 2876.1
  Top Layer w30: C19.2 1380,1834.57 1384.69,1829.88 1386.65,1829.88 1395.98,1820.55 U9.2 1549.45,1820.55 1550,1820 1745.2,1820 U9.4 1745.75,1818.41 1761.26,1802.9 C20.1 1875,1801.8 v1(1875,1740)
  Bottom Layer w10: U1.48 1020.55,1640.55 1030,1650 1039.45,1659.45 U1.1 ; R1.2 1116.54,1850.59 1123.35,1857.4 U3.3 ; U1.24 1339.45,1350.55 1340,1350
  Bottom Layer w30: U6.4 938.66,1684.8 C4.2 996.54,1683.46 1030,1650 ; C4.2@944.69,1690.12 946.65,1690.12 970,1713.46 970,1764.69 965.31,1760 R11.2 R9.2 903.46,1903.46 930,1930 1325,1930 1387.73,1867.27 1387.73,1839.2 R12.2 1542.63,1836.93 v1(1559.41,1820.14) ; C6.1 973.94,1762.6 C5.1 1042.6,1760 R1.2 ; 1340,1350 1363.46,1326.54 C7.1 1461.54,1326.54 v1(1875,1740)
5V: C3.1 C16.2 C17.1 C18.2 L2.1 U4.8 U8.1 U9.3 | length 2857.9
  Top Layer w20: L2.1 1894.72,1460 U8.1 2014.57,1458.03 2014.57,1401.97 C16.2 v1(1970,1400)
  Top Layer w30: C18.2 1476.54,1733.46 U9.3 1480,1628.39 1651.61,1628.39 1696.1,1583.9 C17.1 1696.1,1483.9 1707.6,1472.4 L2.1
  Bottom Layer w20: v1(1970,1400) 2610,2040 2610,2820 2576.54,2853.46 C3.1
  Bottom Layer w30: U4.8@2423.19,2853.46 C3.1
12V: C12.2 C14.1 C15.2 L1.2 P5.2 U7.4 U7.5 U8.2 U8.3 | length 3448.7
  Top Layer w20: U8.2 U8.3 2133.43,1460 2138.31,1464.88 2140.31,1464.88 C15.2@2150,1474.57 ; C15.2 2151.74,1474.8 2151.74,1448.26 2170,1430
  Top Layer w30: L1.2 1253.35,1830.36 U7.5 U7.4 1258.78,1640.44 1260,1639.22 C12.2@1260,1575.43 ; C12.2 C12.2@1260,1575.43 ; 2170,1430 2277.39,1430 ; v1(2400.53,1294.55) 1560.45,1294.55 1370,1485 1370,1520 1306.54,1583.46 1274.5,1583.46 1271.15,1580.12 1264.69,1580.12 C12.2@1260,1575.43
  Top Layer w60: 2277.39,1430 2350.89,1356.5 ; 2332.13,1350 2344.39,1350 2350.89,1356.5 ; C14.1 2399.72,1476.1 2399.72,1401.68 2400,1401.4 v1@2400,1356.5 ; v1(2400,1350) v1@2400,1356.5 ; 2350.89,1356.5 v1@2400,1356.5
  Bottom Layer w60: P5.2 2238.57,411.43 2145,505 2145,1145 2280,1280 2385.98,1280 v1(2400.53,1294.55) 2400.53,1349.47 v1(2400,1350)
24V: C10.1 C11.2 D7.1 P19.9 P19.10 P33.9 P33.10 R16.2 U2.10 | length 5890.1
  Top Layer w20: U2.10 265,1870 290,1845 v1(290,1780) 290,1390 480,1200 1180,1200 1310,1330 1310,1440 1290,1460 1174.57,1460 1140,1494.57 R16.2 1063.46,1496.54 1040,1520 1040,1550 ; C10.1@820.12,1550 1040,1550 ; D7.1 1070,1607.12 1069.17,1606.3 1046.88,1606.3 1040,1599.41 1040,1550
  Top Layer w30: C11.2 815.43,1510 820.12,1514.69 C10.1@820.12,1550
  Bottom Layer w30: P19.10 P19.9 1155,967.3 1155,1040 1095,1100 440,1100 290,1250 v1(290,1780) 290,1935 615,2260 1399.7,2260 P33.9 P33.10
+24_REL: 
+24_REL2: 
_COM1: P7.3 P7.4 P8.2 | length 1033.2
  Top Layer w60: P8.2 1837,337 2250,750 2350,750 2406,806 P7.3 ; P7.3@2406,853.68 P7.4
_COM2: P10.3 P10.4 P11.2 | length 1132.8
  Top Layer w60: P11.2 1236,386 1490,640 1720,640 1892,812 P10.3
_COM3: P13.1 P13.2 P14.1 | length 745.5
  Top Layer w60: P13.1 P13.2 789,286.43 P14.1
_COM4: P16.1 P16.2 P17.1 | length 751.5
  Top Layer w60: P16.1 P16.2 376,300.93 P17.1
_COM5: P21.3 P21.4 P22.2 | length 796.6
  Top Layer w60: P21.4 P21.3 270,2936.5 P22.2
_COM6: P24.3 P24.4 P25.2 | length 832.2
  Top Layer w60: P24.3 P24.4 784.07,2850.57 P25.2
_COM7: P27.1 P28.1 P28.2 | length 909
  Top Layer w60: P27.1 1442.57,2921.73 P28.2 P28.1
_COM8: P30.1 P30.2 P31.1 | length 916.9
  Top Layer w60: P31.1 1839.57,2940.73 P30.2 P30.1
_NC1: P7.1 P7.2 P8.1 | length 1102.8
  Top Layer w60: P8.1 1637,367 1710,440 1810,440 2236.3,866.3 P7.1 P7.2
_NC2: P10.1 P10.2 P11.1 | length 1062
  Top Layer w60: P11.1 1436,416 1570,550 1750,550 1992,792 P10.2 P10.1
_NC5: P21.1 P21.2 P22.1 | length 838
  Top Layer w60: P21.2 P21.1 370,2836.5 P22.1
_NC6: P24.1 P24.2 P25.1 | length 790.8
  Top Layer w60: P24.1 P24.2 684.07,2950.57 P25.1
_NO1: P7.5 P7.6 P8.3 | length 973.3
  Top Layer w60: P8.3 2037,397 2298.75,658.75 2388.75,658.75 2506,776 P7.5 P7.6
_NO2: P10.5 P10.6 P11.3 | length 1206.8
  Top Layer w60: P11.3 1036,396 1360,720 1645.7,720 P10.6 P10.5
_NO3: P13.3 P13.4 P14.2 | length 747.2
  Top Layer w60: P14.2 689,290.43 P13.4 P13.3
_NO4: P16.3 P16.4 P17.2 | length 741.2
  Top Layer w60: P17.2 240.07,241.89 276,277.81 P16.4 P16.3
_NO5: P21.5 P21.6 P22.3 | length 755.2
  Top Layer w60: P21.6 P21.5 170,3036.5 P22.3
_NO6: P24.5 P24.6 P25.3 | length 873.6
  Top Layer w60: P24.5 P24.6 884.07,2750.57 P25.3
_NO7: P27.2 P28.3 P28.4 | length 868.9
  Top Layer w60: P27.2 1639.43,2920.57 1984,2576 P28.4 P28.3
_NO8: P30.3 P30.4 P31.2 | length 876.8
  Top Layer w60: P31.2 2036.43,2883.57 2400,2520 P30.3
_REL1: P19.1 P19.2 U2.18 | length 1853.3
  Top Layer w10: U2.18 150,1469.3 150,1300 300,1150 1440,1150 1554,1036 P19.1 P19.2
_REL2: P19.3 P19.4 U2.17 | length 1886.2
  Top Layer w10: U2.17 148.84,1518.14 108.14,1518.14 100,1510 100,1320 290,1130 1360,1130 1454,1036 P19.3 P19.4
_REL3: P19.5 P19.6 U2.16 | length 1870.3
  Top Layer w10: U2.16 100,1570 80,1550 80,1310 280,1110 1270,1110 1354,1026 P19.5 P19.6
_REL4: P19.7 P19.8 U2.15 | length 1848.6
  Top Layer w10: U2.15 100,1620 60,1580 60,1300 270,1090 1180,1090 1254,1016 P19.7 P19.8
_REL5: P33.1 P33.2 U2.14 | length 1763.3
  Top Layer w10: U2.14 100,1670 30,1740 30,1940 100,2010 250,2010 510,2270 1080,2270 1116.23,2306.23 1116.23,2376.53 P33.1 P33.2
_REL6: P33.3 P33.4 U2.13 | length 1779.1
  Top Layer w10: U2.13 148.84,1721.86 108.14,1721.86 50,1780 50,1930 110,1990 260,1990 520,2250 1170,2250 1220,2300 P33.3 P33.4
_REL7: P33.5 P33.6 U2.12 | length 1783.3
  Top Layer w10: U2.12 120,1770 70,1820 70,1920 120,1970 270,1970 530,2230 1240,2230 1316.23,2306.23 1316.23,2376.53 P33.5 P33.6
_REL8: P33.7 P33.8 U2.11 | length 1816.7
  Top Layer w10: U2.11 148.84,1821.86 108.14,1821.86 90,1840 90,1910 130,1950 280,1950 540,2210 1340,2210 1420,2290 P33.7 P33.8
ADDRESS_0: P4.4 U1.21 | length 1331.3
  Bottom Layer w10: U1.21 1450.79,1450.79 1910,1910 1910,2160 1870,2200 1790,2200 1770,2180 1770,2095 P4.4
ADDRESS_1: P4.6 U1.22 | length 1504.8
  Bottom Layer w10: U1.22 1461.1,1431.1 1930,1900 1930,2170 1880,2220 1715,2220 1670,2175 1670,2095 P4.6
ADDRESS_2: P4.8 U1.25 | length 2027.9
  Bottom Layer w10: U1.25 1288.27,1291.73 1310,1270 1465,1270 1950,1755 1950,2180 1890,2240 1695,2240 1665,2210 1505,2210 1470,2175 1470,2125 1510.61,2084.39 1510.61,2054.39 P4.8
ADDRESS_3: P4.10 U1.26 | length 1906.4
  Top Layer w10: P4.10 1471.21,1993.79 2003.79,1993.79 v1(2025,2015)
  Bottom Layer w10: U1.26 1268.58,1276.42 1295,1250 1470,1250 1970,1750 1970,1960 v1(2025,2015)
ADDRESS_4: P4.12 U1.27 | length 2107.7
  Top Layer w10: P4.12 1328.03,2036.97 1328.03,2006.97 1333.46,2001.54 1360,1975 2045,1975 v1(2060,1990)
  Bottom Layer w10: U1.27 1248.9,1271.1 1290,1230 1475,1230 1990,1745 1990,1920 v1(2060,1990)
ADDRESS_5: P4.14 U1.28 | length 2271.2
  Top Layer w10: P4.14 1228.03,2036.97 1228.03,2006.97 1233.46,2001.54 1280,1955 v1(2090,1955)
  Bottom Layer w10: U1.28 1229.21,1265.79 1285,1210 1480,1210 2010,1740 2010,1870 2090,1950 v1(2090,1955)
BUTTON_ON_OFF: P4.2 U1.39 | length 2862.2
  Top Layer w10: P4.2 v1(1990,2045)
  Bottom Layer w10: U1.39 738.9,1431.1 585,1585 585,2055 760,2230 1440,2230 1480,2270 1560,2270 1600,2310 1900,2310 1990,2220 v1(1990,2045)
BUTTON_SELECT: P4.1 U1.20 | length 1005.4
  Bottom Layer w10: U1.20 1440.47,1470.47 1886.5,1916.5 1886.5,2108.5 1854.07,2140.93 1824.07,2140.93 P4.1
COM1: 
COM2: 
COM3: 
COM4: 
COM5: 
COM6: 
COM7: 
COM8: 
GND: C3.2 C4.1 C5.2 C6.2 C7.2 C8.2 C9.2 C10.2 C11.1 C12.1 C14.2 C15.1 C16.1 C17.2 C18.1 C19.1 C20.2 P3.2 P4.16 P4.18 P5.1 R2.1 R6.2 R17.1 U1.8 U1.23 U1.44 U1.47 U2.9 U3.1 U4.5 U5.3 U6.2 U6.5 U7.2 U8.4 U9.1 | length 4284.7
  Top Layer w20: v1(1090,1560) 1090.9,1560.9 1090.9,1581.86 1110,1600.97 1110,1670 ; R17.1@1200,1496.54 C12.1@1260,1496.54 ; C19.1 1387.64,1911.1 U9.1 ; U8.4 2089.76,1560 2119.68,1560
  Top Layer w30: v1(461.21,1870) U2.9 ; 1110,1670 1117.92,1677.92 U7.2 ; 2119.68,1560 2133.46,1560 2143.35,1550.12 2145.31,1550.12 2150,1545.43 C15.1
  Top Layer w60: C20.2 2394.76,1802.9 2397.24,1805.38 C14.2 2542.9,1832.9 v1(2545,1835) 2584.41,1795.59 v1(2584.41,1795.14)
  Bottom Layer w10: v1(733.86,1646.62) 734.25,1647.01 775.12,1647.01 U6.2 ; C4.1 940,1614.57 965.98,1588.58 U1.47 1081.42,1588.58 1090,1580 v1(1090,1560) ; U1.44 1086.05,1529.53 1090,1533.48 v1(1090,1560) ; U1.8 1209.53,1609.53 1160,1560 v1(1090,1560) ; U1.23 1388.58,1411.42 1404.57,1395.43 1428.03,1395.43 C7.2
  Bottom Layer w20: U6.5 872.8,1612.8 936.26,1612.8 C4.1 ; C5.2@1038.03,1835.43 C5.2 v1(1040,1890) 1042.71,1890 1047.51,1894.8 U3.1 1200.87,1893.94 1246.06,1893.94 1270,1870 C9.2 C8.2
  Bottom Layer w30: C6.2 971.97,1835.43 C5.2@1038.03,1835.43 ; R2.1 2201.54,2785 2488.46,2785 C3.2 2491.54,2785 2548.46,2785 R6.2 ; R2.1@2200,2785.43 2236.26,2821.69 2266.81,2821.69 2270,2824.88 U4.5
  Bottom Layer w60: 2435,405 2435.43,405.43 ; P5.1 2435.43,405.43 ; v1@2584.64,1795.36 2604.64,1795.36 2625,1775 2625,595 2435.43,405.43
  other v1: 369.41,1240.14 1522.31,1449.76 1430,1650
I2C1_SCL: R9.1 U1.45 U6.1 | length 643.1
  Bottom Layer w10: R9.1 790,1820 703.86,1733.86 703.86,1620.1 713.95,1610 U6.1 775.51,1584.49 810.79,1549.21 U1.45
I2C1_SDA: R11.1 U1.46 U6.3 | length 467.6
  Bottom Layer w10: R11.1 800,1760 780,1740 780,1689.29 U6.3 780,1684.8 815.2,1684.8 820,1680 820,1590 841.1,1568.9 U1.46
LED_CH1: P4.17 U1.10 | length 1245.8
  Bottom Layer w10: P4.17@1015,2145 1070,2090 1070,1990 1100,1960 1340,1960 1410,1890 1560,1890 1590,1860 1590,1800 1520,1730 1260,1730 1248.9,1718.9 U1.10
LED_CH2: P4.15 U1.11 | length 1153.6
  Bottom Layer w10: P4.15 1170,2095 1170,2015 1205,1980 1345,1980 1415,1910 1570,1910 1610,1870 1610,1790 1530,1710 1272.54,1710 1268.58,1706.05 U1.11
LED_CH3: P4.13 U1.12 | length 1052.4
  Bottom Layer w10: P4.13 1270,2095 1270,2025 1295,2000 1350,2000 1420,1930 1580,1930 1630,1880 1630,1780 1540,1690 1318.82,1690 U1.12
LED_CH4: P4.11 U1.13 | length 983
  Bottom Layer w10: P4.11 1370,2095 1370,2010 1430,1950 1590,1950 1650,1890 1650,1770 1488.27,1608.27 U1.13
LED_CH5: P4.9 U1.14 | length 937
  Bottom Layer w10: U1.14 1498.58,1588.58 1670,1760 1670,1900 1600,1970 1520,1970 1470,2020 1470,2085 1420,2135 P4.9
LED_CH6: P4.7 U1.15 | length 896.8
  Bottom Layer w10: U1.15 1508.9,1568.9 1690,1750 1690,1910 1610,1990 1600,1990 1570,2020 1570,2095 P4.7
LED_CH7: P4.5 U1.40 | length 2171.7
  Top Layer w10: P4.5 1620.23,2145.23 1620.23,2278.7 v1(1620.46,2278.93)
  Bottom Layer w10: U1.40 749.21,1450.79 605,1595 605,2045 770,2210 1445,2210 1485,2250 1590,2250 v1@1620,2280
LED_CH8: P4.3 U1.41 | length 2205.7
  Top Layer w10: P4.3 v1(1720,2275)
  Bottom Layer w10: U1.41 759.53,1470.47 625,1605 625,2035 780,2190 1455,2190 1495,2230 1635,2230 1680,2275 v1(1720,2275)
NC1: 
NC2: 
NC5: 
NC6: 
NetC1_1: 
NetC1_2: 
NetC2_1: 
NetC8_1: C8.1 C9.1 R12.1 U1.9 | length 248.6
  Bottom Layer w10: U1.9 1229.21,1729.21 1253.35,1753.35 1255.31,1753.35 1270,1768.03 C9.1
  Bottom Layer w20: C9.1 C8.1 R12.1
NetC13_1: C13.1 L2.2 U8.5 | length 381.4
  Top Layer w20: U8.5 2050,1590 2071.81,1611.81 2071.81,1620.31 2081.5,1630 C13.1 2083.46,1666.54 2070,1680
  Top Layer w30: L2.2 1890,1621.81 1890,1670 1900,1680 2070,1680
NetC13_2: C13.2 U8.6 | length 69.3
  Top Layer w20: U8.6 2012.6,1626.06 C13.2
NetD1_1: 
NetD2_1: 
NetD3_1: 
NetD4_1: 
NetD5_1: 
NetD6_1: 
NetD7_2: D7.2 L1.1 U7.1 | length 209.7
  Top Layer w20: D7.2 1070,1716.15 1070.83,1715.32 U7.1 1151.46,1829.65 L1.1
NetD8_1: 
NetD9_1: 
NetK3_21: 
NetK4_11: 
NetK7_21: 
NetK8_11: 
NetP1_3: 
NetP1_4: 
NetP1_5: 
NetP1_6: 
NetP1_7: 
NetP1_8: 
NetP1_9: 
NetP1_10: 
NetP1_11: 
NetP1_12: 
NetP1_13: 
NetP1_14: 
NetP1_15: 
NetP1_17: 
NetP2_1: P2.1 R4.1 | length 684.8
  Bottom Layer w10: R4.1 R4.1@2517.04,2943.57
  Bottom Layer w20: P2.1 2239.57,3189.57 2280,3230 2510,3230 2540,3200 2540,2966.54 2525.12,2951.65 2525.12,2949.69 2519.01,2943.57 R4.1@2517.04,2943.57
NetP2_2: P2.2 R3.1 | length 238.1
  Top Layer w10: R3.1 2400,2910 2436.43,2946.43 P2.2
NetR1_1: R1.1 U1.7 U3.2 | length 171.2
  Bottom Layer w10: R1.1 1189.84,1753.62 U1.7
  Bottom Layer w20: R1.1 1185.43,1760 1195.12,1769.69 1195.12,1771.69 1200,1776.57 U3.2
NetR3_2: R3.2 U4.6 U5.2 | length 248.8
  Top Layer w10: v1(2240,2939.72) 2269.72,2910 R3.2
  Bottom Layer w10: v1@2240,2940 U5.2 U4.6
NetR4_2: R4.2 U4.7 U5.1 | length 160.7
  Bottom Layer w10: U4.7 2370.59,2850.59 2370.59,2939.41 U5.1 2436.54,2940 R4.2@2440,2936.54
NetR5_2: R5.2 U4.1 | length 80.8
  Bottom Layer w10: U4.1 2420,2652.83 2426.29,2646.54 R5.2
NetR16_1: R16.1 R17.2 U7.3 | length 146.2
  Top Layer w20: U7.3 1143.78,1640.44 1140,1636.66 R16.1 R17.2@1200,1563.46
NO1: 
NO2: 
NO3: 
NO4: 
NO5: 
NO6: 
NO7: 
NO8: 
REL1: 
REL2: 
REL3: 
REL4: 
REL5: 
REL6: 
REL7: 
REL8: 
RELAY1: U1.29 U2.1 | length 1094.3
  Top Layer w10: v1(450,1470) U2.1
  Bottom Layer w10: v1(450,1470) 450,1390 630,1210 1160,1210 1209.53,1259.53 U1.29
RELAY2: U1.30 U2.2 | length 1084.4
  Top Layer w10: v1(450,1520) U2.2
  Bottom Layer w10: v1(450,1520) 480,1490 480,1390 640,1230 1150,1230 1189.84,1269.84 U1.30
RELAY3: U1.31 U2.3 | length 1074.5
  Top Layer w10: v1(450,1570) U2.3
  Bottom Layer w10: v1(450,1570) 500,1520 500,1400 650,1250 1140,1250 1170.16,1280.16 U1.31
RELAY4: U1.32 U2.4 | length 1064.8
  Top Layer w10: v1(450,1620) U2.4
  Bottom Layer w10: v1(450,1620) 520,1550 520,1410 660,1270 1130,1270 1150,1290 1150,1309.27 1150.13,1309.4 1150.13,1339.87 1150,1340 1150.47,1340.47 U1.32
RELAY5: U1.16 U2.5 | length 1497.9
  Top Layer w10: U2.5 430,1670 400,1640 400,1440 530,1310 1080,1310 1150,1380 v1(1150,1410)
  Bottom Layer w10: v1(1150,1410) 1150,1490 1209.21,1549.21 U1.16
RELAY6: U1.17 U2.6 | length 1596.3
  Top Layer w10: U2.6 430,1720 380,1670 380,1430 520,1290 1110,1290 1190,1370 v1(1190,1410)
  Bottom Layer w10: v1(1190,1410) 1190,1490 1229.53,1529.53 U1.17
RELAY7: U1.18 U2.7 | length 1683
  Top Layer w10: U2.7 440,1770 360,1690 360,1420 510,1270 1150,1270 1230,1350 v1(1230,1410)
  Bottom Layer w10: v1(1230,1410) 1230,1470 1269.84,1509.84 U1.18
RELAY8: U1.19 U2.8 | length 1775.9
  Top Layer w10: U2.8 440,1820 340,1720 340,1410 500,1250 1170,1250 1270,1350 1270,1409.46 v1(1270.35,1409.81)
  Bottom Layer w10: v1(1270.35,1409.81) 1270,1410.17 1270,1470 1290.16,1490.16 U1.19
SWCLK: P3.3 U1.37 | length 120.6
  Bottom Layer w10: P3.3@900,1391.73 U1.37
SWDIO: P3.1 U1.34 | length 530.5
  Bottom Layer w10: P3.1 700,1320 730,1290 1105,1290 1111.1,1296.1 U1.34
USART1_DE: R2.2 U1.33 U4.2 U4.3 | length 5197.3
  Top Layer w10: v1(461.21,1923.79) 462.43,1925 580,1925 620,1885 620,1355 645,1330 1050,1330 1100,1380 v1(1100,1410)
  Bottom Layer w10: v1(461.21,1923.79) 460.06,1922.63 442.63,1922.63 400,1880 400,1410 640,1170 1545,1170 2120,1745 2120,2670 2166.54,2716.54 R2.2 2226.54,2716.54 2245,2735 2295,2735 2320,2710 U4.3 U4.2 ; v1(1100,1410) 1130.44,1379.56 1130.44,1340.9 U1.33
USART1_RX: R5.1 R6.1 U1.43 | length 5236.5
  Top Layer w10: v1(460,2005) v1(685,2005)
  Bottom Layer w10: v1(460,2005) 435,2005 360,1930 360,1390 620,1130 1555,1130 2160,1735 2160,2550 2195,2585 2520,2585 2550,2615 R6.1 2546.93,2713.46 R5.1 ; v1(685,2005) 685,1934.17 670,1919.17 670,1620 780.16,1509.84 U1.43
USART1_TX: U1.42 U4.4 | length 4710
  Top Layer w10: v1(461.21,1963.79) 461.82,1964.39 654.39,1964.39 v1(655,1965)
  Bottom Layer w10: v1(461.21,1963.79) 460.06,1962.63 442.63,1962.63 380,1900 380,1400 630,1150 1550,1150 2140,1740 2140,2620 2181.02,2661.02 U4.4 ; v1(655,1965) 655,1605 769.84,1490.16 U1.42
pads on no net: U1.2 U1.3 U1.4 U1.5 U1.6 U1.35 U1.36 U1.38

## Polygon pours and split planes (outlines as drawn)
GND on Bottom Layer "GND_L02_P001" (solid, remove dead copper, pour order 1): 280,1910 610,2240 610,2250 950,2250 1030,2330 1030,2550 1620,2550 1620,2330 1700,2250 2670,2250 2670,1110 470,1110 280,1300
GND on Bottom Layer "GND_L02_P003" (solid, remove dead copper, pour order 3): 2170,3350 2170,2580 2520,2580 2520,1730 2530,1720 2540,1730 2680,1730 2680,3350
GND on Top Layer "GND_L01_P002" (solid, pour order 2): 2670,2250 1700,2250 1620,2330 1620,2550 1040,2550 1030,2540 1030,2330 950,2250 610,2250 610,2240 280,1910 280,1250 280,1110 2670,1110

## Keep-outs
Keep-Out Layer:
  the board outline again, w10

## Other copper
Top Layer:
  rectangle net GND: 2515,1740 2655,1895
  rectangle net 3V3: 1540,1670 1780,1930
  rectangle net 12V: 2370,1270 2430,1460
Bottom Layer:
  rectangle net GND: 2515,1745 2655,1895
  rectangle net GND: 1070,1460 1120,1600

## Silkscreen, mask and mechanical layers (free items; w line width, h text height)
Top Overlay:
  text "NC5 COM5 NO5" at 710,3320 h45 r180
  text "NO6 COM6 NC6" at 1313.49,3320 h45 r180
  text "NO8 COM8 NO7 COM7" at 2110,3320 h45 r180
  text "A RS485 B" at 2520,3320 h40 r180
  text "JUBERA d.o.o. Sarajevo" at 140,2742 h60
  text "Bosna i Hercegovina" at 140,2628 h60
  text "DE-211024" at 198,1122 h60
  text "OCT. 2024." at 2016,1122 h60
  text "www.imedia.ba" at 932,668 h60
  text "member of iMedia Group" at 697,541 h60
  text "NO4 COM4 NO3 COM3" at 160,20 h45
  text "NO2 COM2 NC2" at 982.17,20 h45
  text "NC1 COM1 NO1" at 1590,20 h45
  text "+12V GND" at 2160,20 h45
Bottom Overlay:
  drawing of 6 lines, arcs and shapes, not listed
  text "220 V" at 850,2913 h70 r180
  text "HIGH VOLTAGE" at 1349,2833 h60 r180
  text "!!! WARNING !!!" at 1372,2645 h60 r180
  text "!!! WARNING !!!" at 1314,617 h60
  text "220 V" at 1837,433 h70
  text "HIGH VOLTAGE" at 1346,425 h60

## Text inside footprints (layer, text, board x,y; h text height)
P4: Top Overlay "2" at 1890,2030 h20; Top Overlay "1" at 1890,2140 h20; Top Overlay "17" at 920,2140 h20; Top Overlay "18" at 920,2040 h20
P7: Top Overlay "1" at 2226,846.3 h20; Top Overlay "2" at 2206,946.3 h20; Top Overlay "5" at 2566,846.3 h20; Top Overlay "6" at 2566,946.3 h20
P10: Top Overlay "1" at 2072,986.3 h20 r180; Top Overlay "2" at 2092,886.3 h20 r180; Top Overlay "5" at 1732,986.3 h20 r180; Top Overlay "6" at 1732,886.3 h20 r180
P13: Top Overlay "3" at 629,986.3 h20 r180; Top Overlay "4" at 629,886.3 h20 r180; Top Overlay "2" at 889,886.3 h20 r180; Top Overlay "1" at 869,986.3 h20 r180
P16: Top Overlay "3" at 216,986.3 h20 r180; Top Overlay "4" at 216,886.3 h20 r180; Top Overlay "2" at 476,886.3 h20 r180; Top Overlay "1" at 456,986.3 h20 r180
P19: Top Overlay "2" at 1654,886.3 h20 r180; Top Overlay "1" at 1634,986.3 h20 r180; Top Overlay "9" at 1094,986.3 h20 r180; Top Overlay "10" at 1094,886.3 h20 r180
P21: Top Overlay "1" at 450,2500.3 h20 r180; Top Overlay "2" at 470,2400.3 h20 r180; Top Overlay "5" at 110,2500.3 h20 r180; Top Overlay "6" at 110,2400.3 h20 r180
P24: Top Overlay "1" at 604.07,2360.3 h20; Top Overlay "2" at 584.07,2460.3 h20; Top Overlay "5" at 944.07,2360.3 h20; Top Overlay "6" at 944.07,2460.3 h20
P28: Top Overlay "3" at 2044,2360.3 h20; Top Overlay "4" at 2044,2460.3 h20; Top Overlay "2" at 1784,2460.3 h20; Top Overlay "1" at 1804,2360.3 h20
P30: Top Overlay "3" at 2460,2360.3 h20; Top Overlay "4" at 2460,2460.3 h20; Top Overlay "2" at 2200,2460.3 h20; Top Overlay "1" at 2220,2360.3 h20
P33: Top Overlay "2" at 1020,2460.3 h20; Top Overlay "1" at 1040,2360.3 h20; Top Overlay "9" at 1580,2360.3 h20; Top Overlay "10" at 1580,2460.3 h20